# Altium PCB loicpinuela.PcbDoc
Units mm, origin at the board's own origin, x right, y up, seen from the top; angles counter-clockwise.
Board outline 70 x 70 mm, 2 copper layers (Top Layer, Bottom Layer), stack 1.62 mm thick; 79 components, 54 nets, 234 pads, 46 vias.
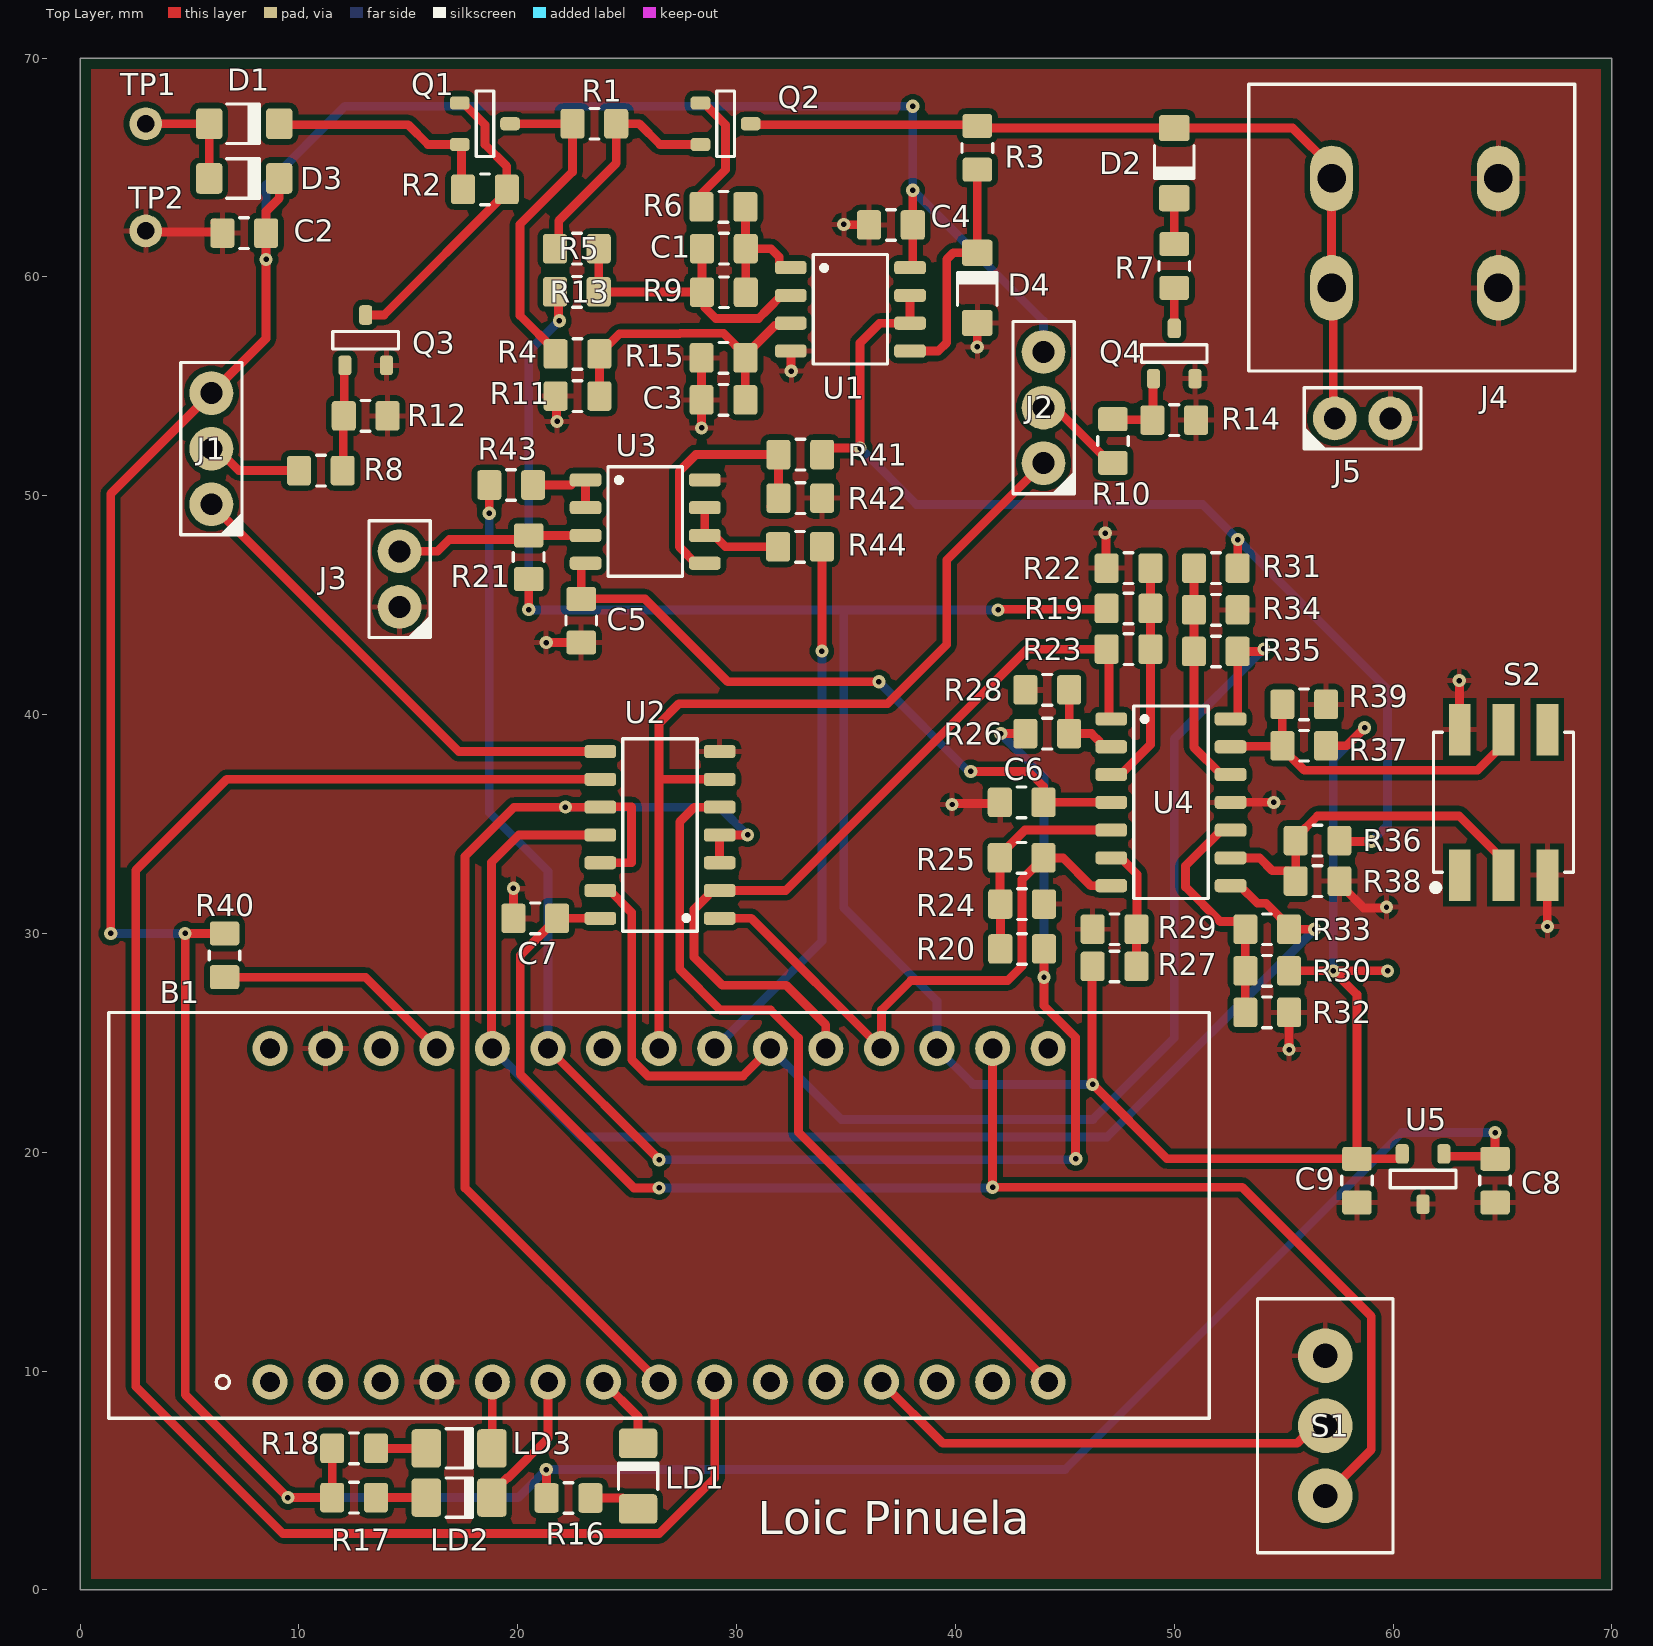
[diagram p0: Top Layer view]
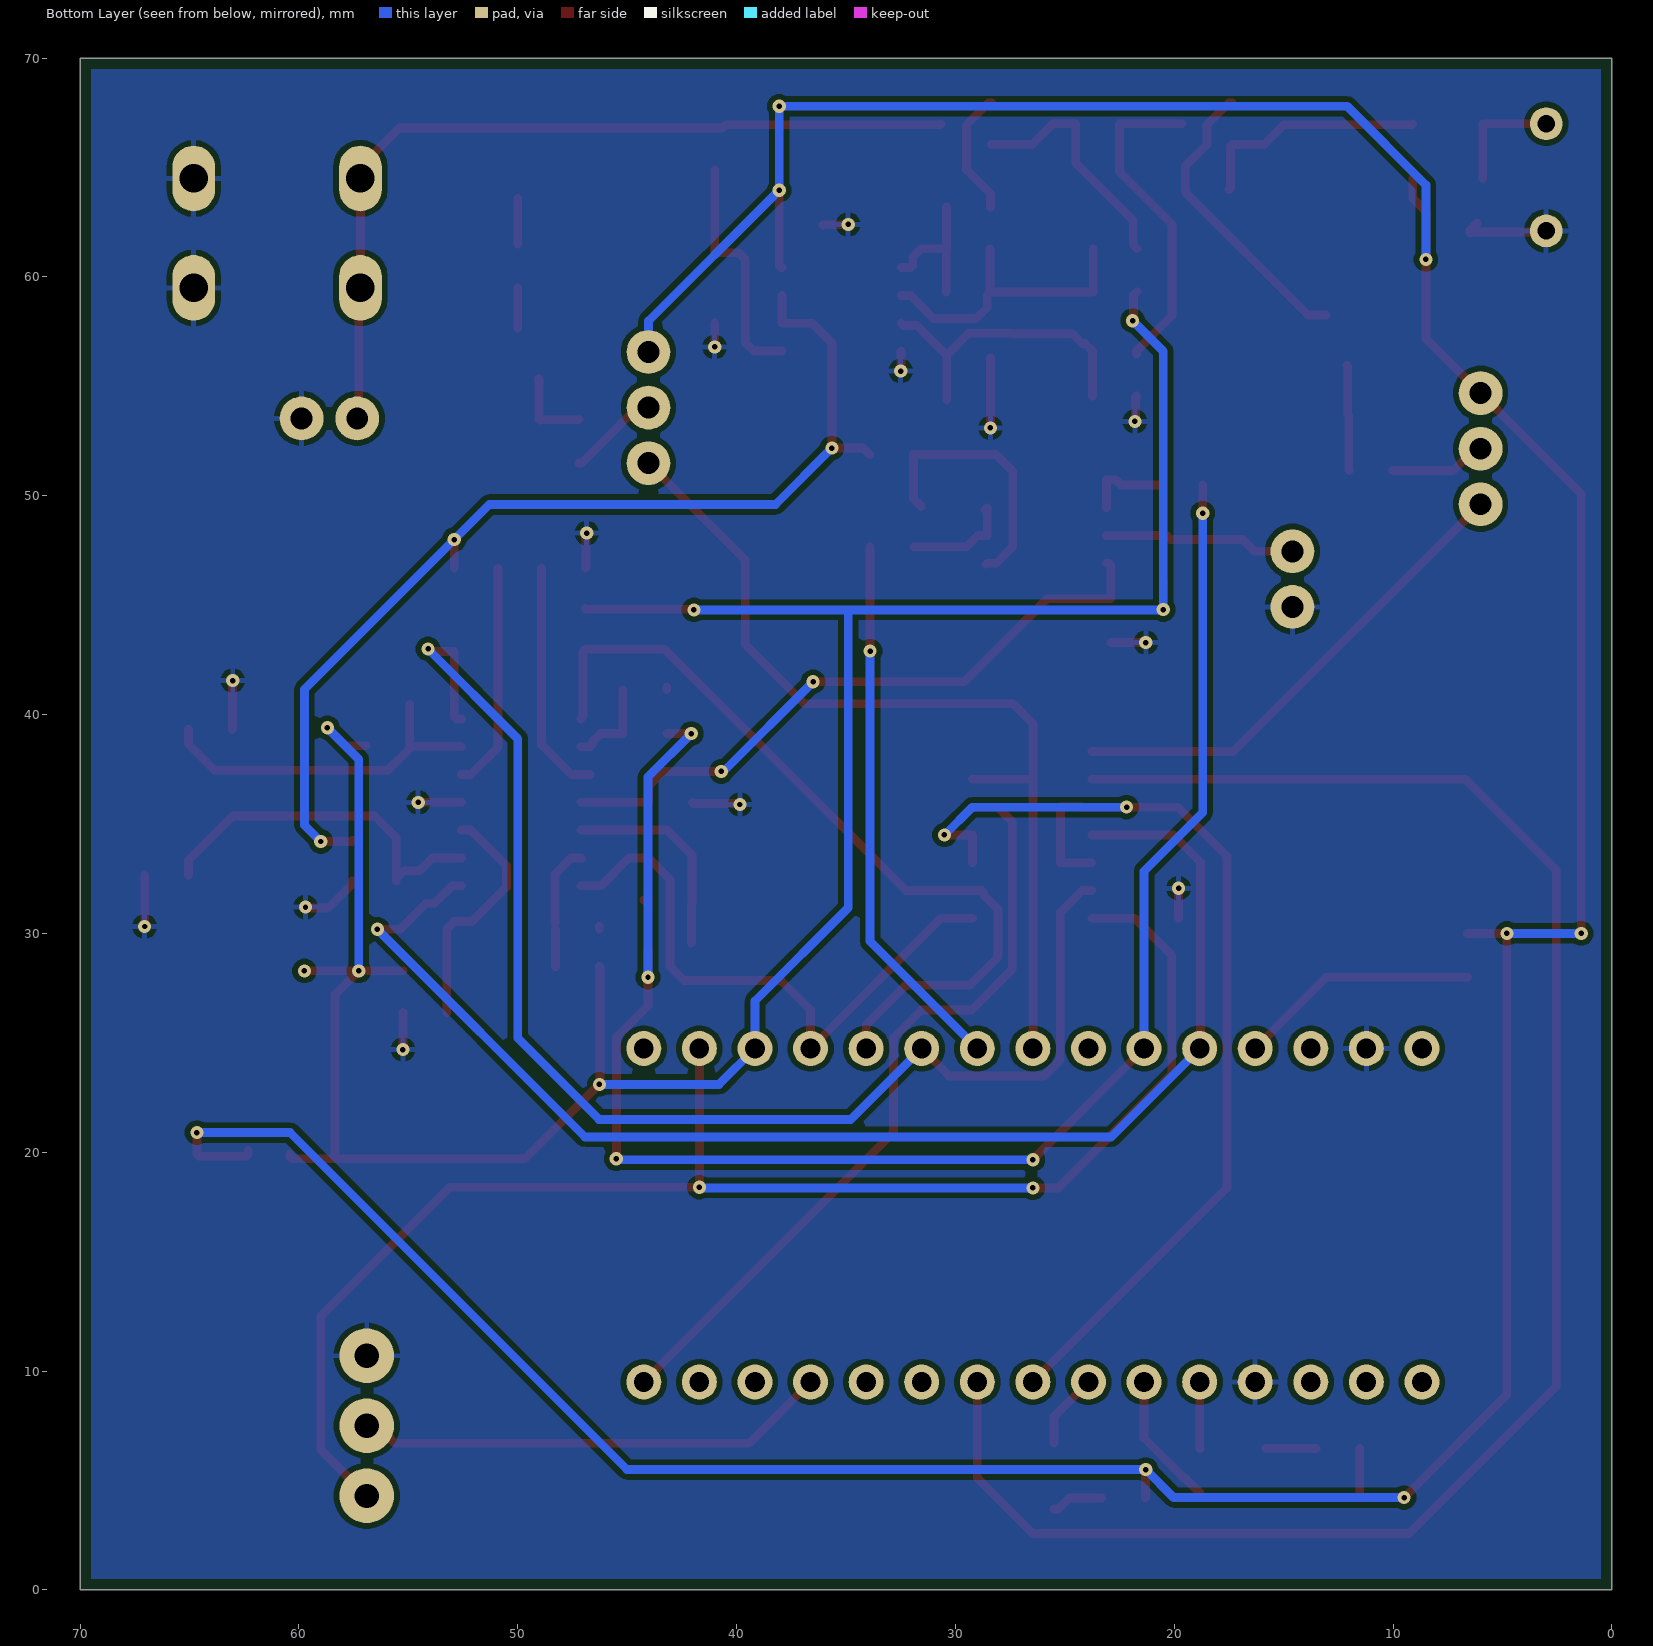
[diagram p1: Bottom Layer view, seen from below]
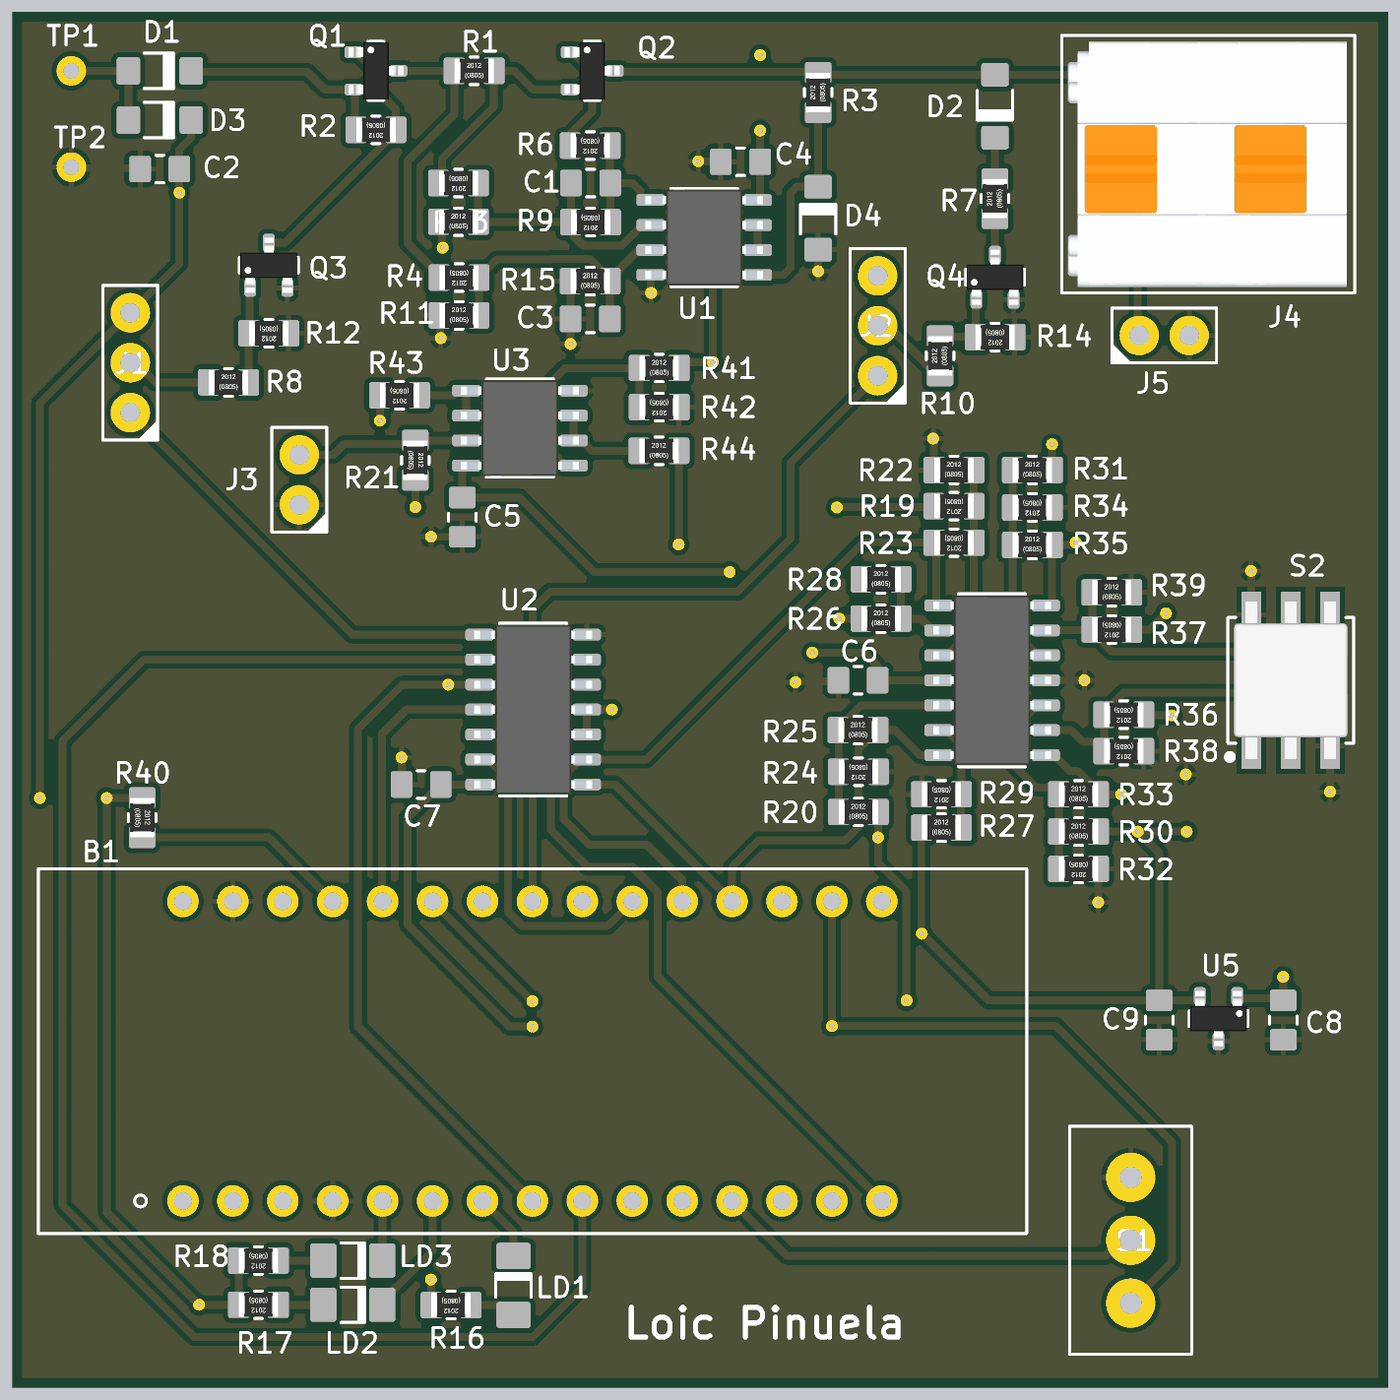
[diagram p2: 3D render of the assembled board from above, using the file's embedded part models]

## Layer stack, top to bottom
Top Solder: solder mask 0.1, Solder Resist, Dk 3.5
Top Layer: signal copper 0.035
Dielectric 1: core 1.55, FR-4, Dk 4.2
Bottom Layer: signal copper 0.035
Bottom Solder: solder mask 0.1, Solder Resist, Dk 3.5

## Board outline
0,0 70,0 70,70 0,70

## Design rules (kind name [scope] priority, off if disabled: settings)
AcuteAngle [All] p1 off: minimum=9.00000000000000E+0001 checktracksonly=TRUE
AssemblyTestPointUsage [All] p1 off:
AssemblyTestpoint [All] p1 off: testpointundercomponent=TRUE minsize=1.016 maxsize=2.54 preferedsize=1.524 minholesize=0 maxholesize=1.016 preferedholesize=0.813 testpointgrid=0.025 usegrid=TRUE gridtolerance=0 allowsidetop=TRUE allowsidebottom=TRUE
BoardOutlineClearance [All] p1 off: gap=0.25 ignorepadtopadclearanceinfootprint=FALSE
Clearance [All] p1: gap=0.25 ignorepadtopadclearanceinfootprint=FALSE
ComponentClearance [All] p1 off: gap=0.25 collisioncheckmode=3 verticalgap=0.25 showdistances=FALSE
DiffPairsRouting [All] p1 off: maxlimit=0.254 minlimit=0.254 mostfreqgap=0.254 toplayer_minwidth=0.381 toplayer_maxwidth=0.381 toplayer_prefwidth=0.381 bottomlayer_minwidth=0.381 bottomlayer_maxwidth=0.381 bottomlayer_prefwidth=0.381 maxuncoupledlength=12.7
FabricationTestPointUsage [All] p1 off: valid=0 allowmultiple=FALSE
FabricationTestpoint [All] p1 off: side=3 testpointundercomponent=TRUE minsize=1.016 maxsize=2.54 preferedsize=1.524 minholesize=0 maxholesize=1.016 preferedholesize=0.813 testpointgrid=0.025 allowsidetop=TRUE allowsidebottom=TRUE usegrid=TRUE gridtolerance=0
FanoutControl Fanout_BGA [IsBGA] p1 off: bgadir=Out bgaviamode=Centered fanoutstyle=Auto fanoutdirection=Alternating viagrid=0.025 // Fanout_BGA (Default Rule)
FanoutControl Fanout_LCC [IsLCC] p2 off: bgadir=Out bgaviamode=Centered fanoutstyle=Auto fanoutdirection=Alternating viagrid=0.025 // Fanout_LCC (Default Rule)
FanoutControl Fanout_SOIC [IsSOIC] p3 off: bgadir=Out bgaviamode=Centered fanoutstyle=Auto fanoutdirection=Alternating viagrid=0.025 // Fanout_SOIC (Default Rule)
FanoutControl Fanout_Small [(CompPinCount < 5)] p4 off: bgadir=Out bgaviamode=Centered fanoutstyle=Auto fanoutdirection=OutThenIn viagrid=0.025 // Fanout_Small (Default Rule)
FanoutControl Fanout_Default [All] p5 off: bgadir=Out bgaviamode=Centered fanoutstyle=Auto fanoutdirection=Alternating viagrid=0.025 // Fanout_Default (Default Rule)
Height [All] p1 off: minheight=0 maxheight=25.4 prefheight=12.7
HoleSize [All] p1: absolutevalues=TRUE maxlimit=3 minlimit=0.25 maxpercent=80.000 minpercent=20.000
HoleToHoleClearance [All] p1 off: gap=0.25 allowstackedmicrovias=TRUE
LayerPairs [All] p1 off: enforce=TRUE
MinimumAnnularRing [All] p1 off: minimumring=0.175
MinimumSolderMaskSliver [All] p1 off: minsoldermaskwidth=0
NetAntennae [All] p1 off: netantennaetolerance=0
PasteMaskExpansion [All] p1 off: expansion=0
PlaneClearance [All] p1 off: clearance=0.25
PlaneConnect [All] p1 off: planeconnectstyle=Direct reliefexpansion=0.5 reliefentries=4 reliefconductorwidth=0.25 reliefairgap=0.25
PolygonConnect [All] p1: connectstyle=Relief reliefconductorwidth=0.25 reliefentries=4 polygonreliefangle="90 Angle" airgapwidth=0.25
RoutingCorners [All] p1 off: cornerstyle=45-Degree minsetback=2.5 maxsetback=2.5
RoutingLayers [All] p1 off: top layer_v5=TRUE bottom layer_v5=TRUE
RoutingPriority [All] p1 off: routingpriority=0
RoutingTopology [All] p1 off: topology=Shortest
RoutingVias [All] p1: holewidth=0.711 width=1.27 viastyle="Through Hole" minholewidth=0.711 minwidth=1.27 maxholewidth=0.711 maxwidth=1.27 useviatemplates=TRUE viatemplateguid#1={857F750E-5D3C-416E-893E-D7E0D3E4223C} viatemplatename#1=v60h25m0mx0
SilkToBoardRegionClearance [All] p1 off:
SilkToSilkClearance [All] p1 off: silktosilkclearance=0
SilkToSolderMaskClearance [IsPad] p1 off: minsilkscreentomaskgap=0 clearancetoexposedcopper=TRUE
SolderMaskExpansion [All] p1: expansion=0 istentingtop=FALSE
Width [All] p1: maxlimit=1 minlimit=0.25 preferedwidth=0.4
3 further rules are at their usual default settings.

## Classes and differential pairs
component class loicpinuela2: C5 C6 J3 R19 R20 R21 R22 R23 R24 R25 R26 R27 R28 R29 R30 R31 R32 R33 R34 R35 R36 R37 R38 R39 R41 R42 R43 R44 S2 U3 U4
component class loicpinuela1: B1 C1 C2 C3 C4 C7 C8 C9 D1 D2 D3 D4 J1 J2 J4 J5 LD1 LD2 LD3 Q1 Q2 Q3 Q4 R1 R2 R3 R4 R5 R6 R7 R8 R9 R10 R11 R12 R13 R14 R15 R16 R17 R18 R40 S1 TP1 TP2 U1 U2 U5

## Components (designator, comment, footprint, x,y, rotation, side; value= is the part's Value field where it differs from the comment)
B1 "NUCLEO-L432KC Socket" "NUCLEO-L432KC Socket" 44.24,9.5 r90 top locked
C1 "NC" "CAPACITOR 2012 REFLOW" 29.42,61.29 r180 top
C2 "10uF" "CAPACITOR 2012 REFLOW" 7.5,62 r0 top
C3 "NC" "CAPACITOR 2012 REFLOW" 29.4,54.38 r0 top
C4 "1uF" "CAPACITOR 2012 REFLOW" 37.05,62.375 r0 top
C5 "1uF" "CAPACITOR 2012 REFLOW" 22.9,44.291 r90 top
C6 "1uF" "CAPACITOR 2012 REFLOW" 43.027,35.991 r0 top
C7 "1uF" "CAPACITOR 2012 REFLOW" 20.8,30.69 r0 top
C8 "1uF" "CAPACITOR 2012 REFLOW" 64.66,18.7 r90 top
C9 "1uF" "CAPACITOR 2012 REFLOW" 58.35,18.7 r90 top
D1 "PMEG3010EXEX" "DIODE SOD123-FL REFLOW" 7.5,67 r180 top
D2 "PMEG3010EXEX" "DIODE SOD123-FL REFLOW" 50,65.2 r90 top
D3 "PMEG3010EXEX" "DIODE SOD123-FL REFLOW" 7.5,64.5 r180 top
D4 "PMEG3010EXEX" "DIODE SOD123-FL REFLOW" 41,59.5 r270 top
J1 "*" "PinHeader1x3 P2.54" 6,52.15 r90 top
J2 "*" "PinHeader1x3 P2.54" 44.027,54.03 r90 top
J3 "" "Socket1x2 P2.54" 14.6,46.191 r90 top
J4 "*" "WE 691411810002" 61,62 r180 top
J5 "" "Socket1x2 P2.54" 58.607,53.534 r0 top
LD1 "*" "LED 3216 REFLOW" 25.5,5.2 r270 top
LD2 "*" "LED 3216 REFLOW" 17.319,4.217 r180 top
LD3 "*" "LED 3216 REFLOW" 17.319,6.467 r180 top
Q1 "*" "SOT23 P0.95 C1.6x3.0 H1.3" 18.5,67 r0 top
Q2 "*" "SOT23 P0.95 C1.6x3.0 H1.3" 29.5,67 r0 top
Q3 "*" "SOT23 P0.95 C1.6x3.0 H1.3" 13.05,57.11 r90 top
Q4 "*" "SOT23 P0.95 C1.6x3.0 H1.3" 50,56.5 r90 top
R1 "3R3" "RESISTOR 2012 REFLOW" 23.5,67 r0 top
R2 "100k" "RESISTOR 2012 REFLOW" 18.5,64 r180 top
R3 "10k" "RESISTOR 2012 REFLOW" 41,65.9 r90 top
R4 "15k" "RESISTOR 2012 REFLOW" 22.73,56.48 r180 top
R5 "15k" "RESISTOR 2012 REFLOW" 22.7,61.29 r180 top
R6 "1k" "RESISTOR 2012 REFLOW" 29.4,63.2 r180 top
R7 "28" "RESISTOR 2012 REFLOW" 50,60.5 r90 top
R8 "1k" "RESISTOR 2012 REFLOW" 11,51.15 r0 top
R9 "NC" "RESISTOR 2012 REFLOW" 29.42,59.3 r180 top
R10 "1k" "RESISTOR 2012 REFLOW" 47.2,52.5 r90 top
R11 "100k" "RESISTOR 2012 REFLOW" 22.73,54.555 r0 top
R12 "100k" "RESISTOR 2012 REFLOW" 13.05,53.65 r180 top
R13 "100k" "RESISTOR 2012 REFLOW" 22.7,59.32 r0 top
R14 "100k" "RESISTOR 2012 REFLOW" 50,53.455 r180 top
R15 "NC" "RESISTOR 2012 REFLOW" 29.4,56.3 r0 top
R16 "1k" "RESISTOR 2012 REFLOW" 22.32,4.2 r180 top
R17 "1k" "RESISTOR 2012 REFLOW" 12.52,4.217 r180 top
R18 "1k" "RESISTOR 2012 REFLOW" 12.52,6.467 r180 top
R19 "121k" "RESISTOR 2012 REFLOW" 47.911,44.851 r180 top
R20 "105k" "RESISTOR 2012 REFLOW" 43.048,29.291 r0 top
R21 "100k" "RESISTOR 2012 REFLOW" 20.5,47.191 r270 top
R22 "806k" "RESISTOR 2012 REFLOW" 47.911,46.691 r0 top
R23 "1M" "RESISTOR 2012 REFLOW" 47.911,42.991 r180 top
R24 "NC" "RESISTOR 2012 REFLOW" 43.048,31.341 r180 top
R25 "1M" "RESISTOR 2012 REFLOW" 43.027,33.451 r0 top
R26 "0R" "RESISTOR 2012 REFLOW" 44.197,39.131 r0 top
R27 "274k" "RESISTOR 2012 REFLOW" 47.272,28.491 r0 top
R28 "NC" "RESISTOR 2012 REFLOW" 44.197,41.131 r0 top
R29 "1M" "RESISTOR 2012 REFLOW" 47.272,30.191 r180 top
R30 "*" "RESISTOR 2012 REFLOW" 54.248,28.291 r0 top
R31 "*" "RESISTOR 2012 REFLOW" 51.898,46.691 r0 top
R32 "*" "RESISTOR 2012 REFLOW" 54.248,26.391 r180 top
R33 "*" "RESISTOR 2012 REFLOW" 54.248,30.191 r0 top
R34 "*" "RESISTOR 2012 REFLOW" 51.898,44.784 r180 top
R35 "*" "RESISTOR 2012 REFLOW" 51.898,42.884 r0 top
R36 "*" "RESISTOR 2012 REFLOW" 56.548,34.241 r180 top
R37 "*" "RESISTOR 2012 REFLOW" 55.939,38.576 r180 top
R38 "*" "RESISTOR 2012 REFLOW" 56.548,32.391 r180 top
R39 "*" "RESISTOR 2012 REFLOW" 55.939,40.466 r0 top
R40 "NC" "RESISTOR 2012 REFLOW" 6.6,29 r270 top
R41 "100k" "RESISTOR 2012 REFLOW" 32.913,51.881 r0 top
R42 "100k" "RESISTOR 2012 REFLOW" 32.913,49.891 r180 top
R43 "1k" "RESISTOR 2012 REFLOW" 19.7,50.491 r180 top
R44 "1k" "RESISTOR 2012 REFLOW" 32.9,47.667 r0 top
S1 "*" "SLIDE SWITCH Knitter MFP120" 56.9,7.5 r90 top
S2 "*" "Push Button E-Switch TL2233" 65.048,35.991 r90 top
TP1 "*" "Hole 0.8 D1.5" 3,67 r90 top
TP2 "*" "Hole 0.8 D1.5" 3.003,62.1 r90 top
U1 "MCP6042-I/SN" "SO8 P1.27 C4.0X5.0 H1.75" 35.2,58.52 r0 top
U2 "" "SO14 P1.27 C4.0X8.8 H1.75" 26.5,34.5 r180 top
U3 "MCP6042-I/SN" "SO8 P1.27 C4.0X5.0 H1.75" 25.825,48.822 r0 top
U4 "MCP6544-E/SL" "SO14 P1.27 C4.0X8.8 H1.75" 49.848,35.991 r0 top
U5 "3.3" "SOT23 P0.95 C1.6x3.0 H1.3" 61.371,18.775 r270 top

## Footprints (in the part's own frame and the unit in brackets; to place one, negate y for a bottom-side part, rotate by r counter-clockwise, add the part's x,y. Pads: shape width x height; smd on the part's side, far side on the other; paste and mask are expansions set on the pad)
"CAPACITOR 2012 REFLOW" [mm] "Capacitor SMD 2.0x1.2mm (0805-imperial)"
  rrect25% 1.1x1.35 smd: 1(-1,0) 2(1,0)
  silkscreen extent -0.2,-0.7 0.2,0.7, body extent -1,-0.6 1,0.6, height 1
"DIODE SOD123-FL REFLOW" [mm] "DIODE SMD SOD123-FL, 2-Leads, Body 2.8x1.60mm"
  rrect25% 1.2x1.4 smd: 1(-1.6,0) 2(1.6,0)
  silkscreen extent -0.77,-0.9 0.8,0.9, body extent -1.9,-0.9 1.9,0.9, height 1.31
"Hole 0.8 D1.5" [mm] "Test Point Hole 0.8 Pad diameter 1.5"
  round 1.5 hole 0.8: 1(0,0)
"LED 3216 REFLOW" [mm] "LED SMD 3.2x1.6mm (1206-imperial)"
  rrect25% 1.35x1.75 smd: 1(-1.5,0) 2(1.5,0)
  silkscreen extent -0.6,-0.9 0.6,0.9, body extent -1.7,-0.9 1.7,0.9, height 1.1
"NUCLEO-L432KC Socket" [mm] "ARM Cortex based board"
  round 1.6 hole 0.9: 1(0,35.56) 2(0,33.02) 3(0,30.48) 4(0,27.94) 5(0,25.4) 6(0,22.86) 7(0,20.32) 8(0,17.78) 9(0,15.24) 10(0,12.7) 11(0,10.16) 12(0,7.62) 13(0,5.08) 14(0,2.54) 15(0,0) 16(15.24,0) 17(15.24,2.54) 18(15.24,5.08) 19(15.24,7.62) 20(15.24,10.16) 21(15.24,12.7) 22(15.24,15.24) 23(15.24,17.78) 24(15.24,20.32) 25(15.24,22.86) 26(15.24,25.4) 27(15.24,27.94) 28(15.24,30.48) 29(15.24,33.02) 30(15.24,35.56)
  silkscreen extent -1.65,-7.37 16.89,42.93, body extent -1.27,-1.27 16.51,36.83, height 7.01
"PinHeader1x3 P2.54" [mm] "Plug connector"
  round 2 hole 1: 1(-2.54,0) 2(0,0) 3(2.54,0)
  silkscreen extent -3.94,-1.4 3.94,1.4, body extent -3.88,-1.27 3.74,1.27, height 8.5
"Push Button E-Switch TL2233" [mm] "Dual Through Hole Right Angle Tactile Switch"
  rect 2.35x1 smd: 1(-3.325,2) 2(-3.325,0) 3(-3.325,-2) 4(3.325,2) 5(3.325,0) 6(3.325,-2)
  silkscreen extent -4.05,-3.2 3.2,3.25, body extent -4,-2.9 4,2.9, height 7.9
"RESISTOR 2012 REFLOW" [mm] "Resistor SMD 2.0x1.2mm (0805-imperial)"
  rrect25% 1.1x1.35 smd: 1(-1,0) 2(1,0)
  silkscreen extent -0.2,-0.7 0.2,0.7, body extent -1,-0.63 1,0.63, height 0.45
"SLIDE SWITCH Knitter MFP120" [mm] "Slide Switch Knitter-Switch type MFP120"
  round 2.5 hole 1.1: 1(-3.2,0) 2(0,0) 3(3.2,0)
  silkscreen extent -5.8,-3.1 5.8,3.1, body extent -5.5,-2.8 5.5,2.8, height 10
"SO8 P1.27 C4.0X5.0 H1.75" [mm] "8-Pin Small Outline Integrated Circuit 1.27 mm Pitch, IPC Medium Density"
  rrect50% 1.45x0.6 smd: 1(-2.725,1.905) 2(-2.725,0.635) 3(-2.725,-0.635) 4(-2.725,-1.905) 5(2.725,-1.905) 6(2.725,-0.635) 7(2.725,0.635) 8(2.725,1.905)
  silkscreen extent -1.7,-2.5 1.7,2.5, body extent -3,-2.45 3,2.45, height 1.75
"SO14 P1.27 C4.0X8.8 H1.75" [mm] "SOIC, 14-Leads, Body 4.0X8.8mm, Pitch 1.27mm, IPC Medium Density"
  rrect50% 1.45x0.6 smd: 1(-2.725,3.81) 2(-2.725,2.54) 3(-2.725,1.27) 4(-2.725,0) 5(-2.725,-1.27) 6(-2.725,-2.54) 7(-2.725,-3.81) 8(2.725,-3.81) 9(2.725,-2.54) 10(2.725,-1.27) 11(2.725,0) 12(2.725,1.27) 13(2.725,2.54) 14(2.725,3.81)
  silkscreen extent -1.7,-4.4 1.7,4.4, body extent -3,-4.33 3,4.33, height 1.75
"Socket1x2 P2.54" [mm] "Receptacle connector"
  round 2 hole 1: 1(-1.27,0) 2(1.27,0)
  silkscreen extent -2.67,-1.4 2.67,1.4, body extent -2.54,-1.27 2.54,1.27, height 7.01
"SOT23 P0.95 C1.6x3.0 H1.3" [mm] "SOT23, 3-Leads, Body 1.6x3.0mm, Pitch 0.95mm, IPC Medium Density"
  rrect50% 0.9x0.6 smd: 1(-1.15,0.95) 2(-1.15,-0.95) 3(1.15,0)
  silkscreen extent -0.4,-1.5 0.4,1.5, body extent -1.4,-1.45 1.4,1.45, height 1.3
"WE 691411810002" [mm] "PCB screwless connector, male header, Pitch 7.62 mm, 2 poles, WR-TBL Series 4114"
  oval 1.95x3 hole 1.3: 1(-3.81,-2.5) 1(-3.81,2.5) 2(3.81,-2.5) 2(3.81,2.5)
  silkscreen extent -7.3,-6.8 7.6,6.3, body extent -6.9,-6.5 7.3,6, height 13.91

## Part data
B1: "ARM Cortex based board"
C1 C2 C3 C4 C5 C6 C7 C8 C9: library part Capacitor, "Capacitor"
D1 D2 D3 D4: library part "DIODE SCHOTTKY", "Diode Schottky generic 2 Leads"
J1 J2: library part PinHeader1x3, "Plug connector"
J3 J5: library part Socket1x2, "Receptacle connector"
J4: library part Header2, "PCB terminal block"
LD1 LD2 LD3: library part LED, "LED generic"
Q1 Q2: library part "MOS-P SOT23 G-S-D", "Generic MOS-P"
Q3 Q4: library part "MOS-N SOT23 G-S-D", "Generic MOS-N"
R1 R9 R15 R40: library part Resistor, "Resistor"
R2 R3 R4 R5 R6 R7 R8 R10 R11 R12 R13 R14 R16 R17 R18 R19 R20 R21 R22 R23 R24 R25 R26 R27 R28 R29 R30 R31 R32 R33 R34 R35 R36 R37 R38 R39 R41 R42 R43 R44: library part Resistor, "Resistor", tolerance=1%
S1: library part "Slide Switch 1Pole ON-ON", "Slide Switch 1Pole ON-ON"
S2: library part "Push Button E-Switch TL2233", "Pushbutton, DPDT, SMD Switch"
TP1 TP2: library part Hole, "Hole"
U1 U3: library part "OPA DUAL", "Generic dual OPA 8 pins"
U2: library part "GATE AND 3X  TRIPLE INPUT 14P", "GATE AND 3X  TRIPLE INPUT 14P"
U4: library part "COMPARATOR QUAD OUT PIN 1-7-8-14", "Generic quad comparator 14 pins, Outpout PIN 1-7-18-14"
U5: library part "REFERENCE SOT23 IN,OUT,GND", "Generic Positive Voltage Reference"

## Via types
v1: diameter 0.6, hole 0.25, Top Layer to Bottom Layer, 46 vias

## Nets (pads, with @x,y where several pads share a name; then routed paths per layer and width w, separated by ;. In a path a pad name is that pad's centre, name@x,y a point inside that pad or via, vN(x,y) a via of type N, cw(c..) or ccw(c..) an arc to the next point about the centre after c; other vN are vias at no path point)
3V3: C5.2 C6.2 U3.4 U4.4 | length 30.3
  Top Layer w0.4: U3.4 23,46.917 22.9,46.817 C5.2 25.809,45.291 29.6,41.5 v1(36.5,41.5) ; v1(40.7,37.4) 43.34,37.4 44.027,36.713 C6.2 U4.4
  Bottom Layer w0.4: v1(36.5,41.5) 40.6,37.4 v1(40.7,37.4)
+3V3: B1.17 C7.2 S1.1 U2.14 | length 68.7
  Top Layer w0.4: U2.14 C7.2 20.11,29 20.11,23.564 25.304,18.37 v1(26.463,18.37) ; B1.17 v1(41.7,18.4) 53.1,18.4 59,12.5 59,6.4 S1.1
  Bottom Layer w0.4: v1(26.463,18.37) 41.67,18.37 v1(41.7,18.4)
+5V0: C2.2 C4.2 C8.2 D3.1 J1.3 J2.3 R16.2 R17.2 R18.2 R40.1 U1.8 U5.1 | length 193.6
  Top Layer w0.4: v1(1.4,30) 1.4,50.09 J1.3 8.5,57.19 v1(8.5,60.8) C2.2 8.5,63 9.1,63.6 D3.1 ; R40.1 v1(4.8,30) 4.8,8.917 v1(9.5,4.217) R17.2 R18.2 ; v1(21.3,5.5) 21.31,5.49 21.31,4.21 R16.2 ; U1.8 37.95,60.425 38.05,60.525 C4.2 v1(38.05,63.96) ; U5.1@62.321,20.075 U5.1 62.321,19.913 62.421,19.813 64.548,19.813 64.66,19.925 v1(64.66,20.9)
  Bottom Layer w0.4: v1(1.4,30) v1(4.8,30) ; v1(8.5,60.8) 8.5,64.2 12.1,67.8 v1(38.048,67.8) 38.05,67.798 v1(38.05,63.96) 44.027,57.983 J2.3 ; v1(9.5,4.217) 20.017,4.217 v1(21.3,5.5) 45.005,5.5 60.405,20.9 v1(64.66,20.9)
+5V5: D1.2 D3.2 TP1.1 | length 5.4
  Top Layer w0.4: TP1.1@3,67 D1.2 D3.2
BattH: B1.26 R33.2 U2.11 U4.8 | length 61.9
  Top Layer w0.4: B1.26 18.8,24.78 18.8,33.248 20.052,34.5 U2.11 ; U4.8 52.998,32.181 53.806,31.373 54.191,31.373 55.373,30.191 v1(56.415,30.191)
  Bottom Layer w0.4: B1.26 22.88,20.7 46.924,20.7 v1(56.415,30.191)
BattL: B1.21 R35.2 U2.13 U4.14 | length 61.2
  Top Layer w0.4: U2.13 24.2,31.96 25.21,30.95 25.21,24.222 25.942,23.49 30.29,23.49 B1.21 ; U4.14 52.798,39.801 52.898,39.901 R35.2 53.984,42.884 v1(54.1,43)
  Bottom Layer w0.4: B1.21 34.78,21.5 46.282,21.5 50,25.218 50,38.9 v1(54.1,43)
GND: B1.4 B1.29 C2.1 C3.1 C4.1 C5.1 C6.1 C7.1 C8.1 C9.1 D4.2 J3.1 J4.1 J5.2 Q3.2 Q4.2 R11.1 R12.1 R14.1 R15.1 R22.1 R24.1 R28.1 R29.2 R32.1 R34.1 R38.1 R39.2 R42.1 S1.3 S2.3 S2.4 TP2.1 U1.4 U2.7 U3.8 U4.11 U5.3 | length 30.1
  Top Layer w0.4: TP2.1 3.053,62.05 6.45,62.05 C2.1 6.5,62.125 C2.1@6.15,62.475 ; v1@19.752,32.11 v1(19.8,32.062) C7.1 ; v1(21.3,43.291) C5.1 ; R11.1 21.765,54.52 21.765,53.435 v1(21.8,53.4) ; v1(28.4,53.1) C3.1 R15.1 ; U1.4 32.487,56.603 32.487,55.712 v1(32.5,55.7) ; v1(34.9,62.4) 34.913,62.387 36.038,62.387 C4.1 ; v1(39.848,35.891) 39.898,35.941 41.977,35.941 C6.1 ; v1(41,56.8) D4.2 ; R28.1 R28.1@43.197,41.256 ; R24.1 R24.1@44.232,31.524 ; R29.2 R29.2@46.272,30.316 ; v1(46.848,48.291) 46.88,48.259 46.88,46.722 R22.1 ; U4.11 v1(54.548,35.991) ; v1(55.248,24.691) R32.1 ; R38.1 57.548,32.266 58.654,31.16 59.66,31.16 v1(59.7,31.2) ; v1(63.023,41.555) 63.036,41.542 63.036,39.328 S2.4 ; v1(67.048,30.316) S2.3
LED_B: B1.7 LD1.1 | length 3.5
  Top Layer w0.4: B1.7 25.5,7.92 LD1.1
LED_G: B1.6 LD2.1 | length 6.4
  Top Layer w0.4: LD2.1 18.819,4.417 19.544,5.142 19.582,5.142 21.38,6.94 B1.6
LED_R: B1.5 LD3.1 | length 3
  Top Layer w0.4: LD3.1 18.83,6.477 18.83,9.489 B1.5
MCU_CH: B1.9 U2.9 | length 81.2
  Top Layer w0.4: U2.9 6.7,37.04 2.547,32.887 2.547,9.292 9.264,2.575 26.463,2.575 29,5.112 B1.9
MCU_DIS: B1.15 U2.5 | length 36
  Top Layer w0.4: U2.5 28.8,35.77 28.07,35.77 27.4,35.1 27.4,28.361 29.261,26.5 31.547,26.5 32.83,25.218 32.83,20.91 B1.15
NetB1_12: B1.12 S1.2 | length 21.8
  Top Layer w0.4: B1.12 39.419,6.701 55.616,6.701 56.415,7.5 S1.2
NetB1_27: B1.27 R40.2 | length 11.1
  Top Layer w0.4: R40.2 13.04,28 B1.27
NetC1_1: C1.1 R6.1 R9.1 U1.1 | length 6.5
  Top Layer w0.4: R6.1 30.41,63.19 30.41,61.3 C1.1 ; R9.1 C1.1 ; U1.1 32.05,60.425 31.95,60.525 31.95,60.91 31.57,61.29 C1.1
NetD1_1: D1.1 Q1.2 R2.2 | length 10.8
  Top Layer w0.4: D1.1 9.15,66.95 15,66.95 15.9,66.05 Q1.2 17.425,65.975 17.425,64.075 R2.2
NetD2_1: D2.1 R7.2 | length 2.1
  Top Layer w0.4: R7.2 D2.1
NetD4_1: D4.1 R3.1 U1.5 | length 11
  Top Layer w0.4: U1.5 39.22,56.615 39.6,56.995 39.6,60.802 39.898,61.1 D4.1 R3.1
NetJ1_2: J1.2 R8.1 | length 4.4
  Top Layer w0.4: J1.2 6.263,52.15 7.263,51.15 R8.1
NetJ2_2: J2.2 R10.1 | length 4.2
  Top Layer w0.4: J2.2 44.334,53.724 44.851,53.724 47.075,51.5 R10.1
NetJ3_2: J3.2 R21.1 U3.3 | length 8.8
  Top Layer w0.4: J3.2 16.333,47.461 16.873,48 20.184,48 20.373,48.189 23.098,48.189 U3.3
NetLD1_2: LD1.2 R16.1 | length 2.4
  Top Layer w0.4: R16.1 24.8,4.2 25.3,3.7 LD1.2
NetLD2_2: LD2.2 R17.1 | length 2.3
  Top Layer w0.4: R17.1 LD2.2
NetLD3_2: LD3.2 R18.1 | length 2.3
  Top Layer w0.4: R18.1 LD3.2
NetQ1_1: Q1.1 Q3.3 R2.1 | length 13.8
  Top Layer w0.4: Q3.3 13.885,58.26 19.5,63.875 R2.1 19.5,65.05 18.5,66.05 18.5,66.95 17.5,67.95 Q1.1
NetQ1_3: Q1.3 R1.1 R4.2 | length 15
  Top Layer w0.4: Q1.3 R1.1 22.5,64.8 20.1,62.4 20.1,58.235 21.73,56.605 R4.2
NetQ2_1: Q2.1 R6.2 | length 5.8
  Top Layer w0.4: Q2.1 28.495,67.95 29.495,66.95 29.495,64.895 28.4,63.8 R6.2
NetQ2_2: Q2.2 R1.2 R5.2 | length 11.1
  Top Layer w0.4: R5.2 21.875,61.465 21.875,62.565 24.5,65.19 R1.2 25.55,67 26.5,66.05 Q2.2
NetQ3_1: Q3.1 R8.2 R12.2 | length 4.9
  Top Layer w0.4: R8.2 12.025,51.175 12.025,53.625 R12.2 12.075,53.675 12.075,55.935 Q3.1
NetQ4_1: Q4.1 R10.2 R14.2 | length 3.7
  Top Layer w0.4: R10.2 47.222,53.478 48.978,53.478 R14.2 49.025,53.48 49.025,55.325 Q4.1
NetQ4_3: Q4.3 R7.1 | length 1.8
  Top Layer w0.4: Q4.3 R7.1
NetR19_1: R19.1 R22.2 R23.1 U4.3 | length 10.8
  Top Layer w0.4: U4.3@46.698,37.261 U4.3 47.548,37.261 48.911,38.623 R23.1 R19.1 R22.2
NetR20_1: R20.1 R24.2 R25.1 U4.5 | length 9.6
  Top Layer w0.4: R20.1@42.069,29.566 42.059,29.576 42.059,31.33 R24.2 42.038,31.351 42.038,33.565 42.027,33.576 43.172,34.721 U4.5
NetR26_2: R26.2 R28.2 U4.2 | length 4.2
  Top Layer w0.4: R28.2 45.197,40.831 R26.2 46.22,39.131 46.598,38.752 46.598,38.631 46.698,38.531 U4.2
NetR27_2: R27.2 R29.1 U4.6 | length 5.5
  Top Layer w0.4: U4.6@47.079,33.406 U4.6 47.548,33.451 48.298,32.701 R29.1@48.298,30.467 ; R27.2 R29.1
NetR30_1: R30.1 R32.2 R33.1 U4.10 | length 10.8
  Top Layer w0.4: U4.10 52.148,34.721 50.514,33.086 50.514,32.125 52.098,30.541 52.898,30.541 R33.1 ; R32.2 R30.1 R33.1@53.248,29.991
NetR31_1: R31.1 R34.2 R35.1 U4.12 | length 10.4
  Top Layer w0.4: R31.1 R34.2 R35.1 50.898,38.511 52.148,37.261 U4.12
NetR36_2: R36.2 R38.2 S2.2 U4.9 | length 16.8
  Top Layer w0.4: U4.9 53.898,33.451 54.483,32.866 55.198,32.866 R38.2@55.548,32.516 ; R38.2 R38.2@55.548,32.516 ; S2.2 65.048,33.341 63.023,35.366 56.548,35.366 55.548,34.366 R36.2 R38.2@55.548,32.516
NetR37_2: R37.2 R39.1 S2.5 U4.13 | length 16.1
  Top Layer w0.4: U4.13 52.596,38.553 54.916,38.553 R37.2 ; R39.1 R37.2 ; S2.5 65.048,38.641 63.859,37.451 55.939,37.451 54.939,38.451 R37.2
NetR41_1: R41.1 R42.2 U3.5 | length 12.4
  Top Layer w0.4: U3.5@28.6,46.867 U3.5 28.125,46.917 27.375,47.667 27.375,51.125 28.13,51.881 R41.1 R42.2 31.913,49.863 R42.2@31.563,49.513
NetR43_1: R43.1 U3.1 U3.2 | length 3.8
  Top Layer w0.4: R43.1 22.439,50.491 22.675,50.727 U3.1 U3.2
NetR44_1: R44.1 U3.6 U3.7 | length 5
  Top Layer w0.4: U3.7@28.65,49.357 U3.7 U3.6 28.975,48.187 29.495,47.667 R44.1
TempH: B1.19 R25.2 U2.1 U4.7 | length 27.8
  Top Layer w0.4: U2.1 30.67,30.69 B1.19 36.62,26.5 37.968,27.848 42.387,27.848 43.048,28.51 43.048,30.316 43.048,32.472 R25.2 44.915,33.451 46.185,32.181 U4.7
TempL: B1.20 R23.2 U2.2 U4.1 | length 37.7
  Top Layer w0.4: B1.20 34.08,25.82 32.269,27.631 29.344,27.631 28.05,28.925 28.05,31.089 28.7,31.739 28.7,31.86 28.8,31.96 U2.2 32.245,31.96 39.098,38.813 43.276,42.991 R23.2 47.017,42.884 47.017,39.901 47.117,39.801 U4.1
Vbat: D2.2 J4.2 J5.1 Q2.3 R3.2 | length 38.9
  Top Layer w0.4: Q2.3 30.7,66.95 40.5,66.95 40.65,66.8 D2.2 55.415,66.8 57.19,65.025 57.19,64.5 57.19,59.5 57.263,59.427 57.263,53.608 J5.1
VbattMCU: B1.22 R44.2 | length 25
  Top Layer w0.4: v1(33.9,42.9) R44.2
  Bottom Layer w0.4: B1.22 33.9,29.64 v1(33.9,42.9)
Vchargeok: B1.8 U2.3 U2.4 U2.10 U2.12 | length 51.6
  Top Layer w0.4: U2.12 25.2,33.23 25.2,35.792 U2.10@24.222,35.792 ; U2.10@24.2,35.77 U2.10 v1(22.18,35.77) 19.829,35.77 17.59,33.531 17.59,18.37 B1.8 ; U2.3 U2.4 v1(30.5,34.5)
  Bottom Layer w0.4: v1(22.18,35.77) 29.23,35.77 v1(30.5,34.5)
Vchargeon: J1.1 U2.8 | length 22.5
  Top Layer w0.4: J1.1 17.3,38.31 U2.8
Vdischarge: B1.23 J2.1 U2.6 | length 42.4
  Top Layer w0.4: B1.23 26.46,37.04 ; U2.6 26.46,37.04 ; J2.1 39.6,47.063 39.6,43.2 36.9,40.5 27.364,40.5 26.46,39.596 26.46,37.04
Vmesbat: R31.2 R36.1 R41.2 U1.6 U1.7 | length 49.3
  Top Layer w0.4: R41.2 34.211,52.179 v1(35.645,52.179) 35.645,56.995 36.535,57.885 U1.6 U1.7 ; R31.2 v1(52.9,48) v1(52.9,48) ; R36.1 57.589,34.2 v1(59,34.2)
  Bottom Layer w0.4: v1(35.645,52.179) 38.224,49.6 51.3,49.6 v1(52.9,48) 59.748,41.152 59.748,34.948 v1(59,34.2)
Vref: B1.18 C9.2 R13.1 R19.2 R21.2 R27.1 R30.2 R37.1 U5.2 | length 121.1
  Top Layer w0.4: v1(20.5,44.8) R21.2 ; R13.1 21.862,59.158 21.862,58.038 v1(21.9,58) ; v1(41.948,44.784) 41.982,44.818 46.878,44.818 R19.2 ; R27.1 46.246,28.464 46.246,23.126 v1(46.272,23.1) 49.672,19.7 C9.2 ; R30.2 v1(57.263,28.291) ; R37.1 57.876,38.576 v1(58.7,39.4) ; v1(59.748,28.291) v1(57.263,28.291) ; U5.2 60.421,19.8 60.321,19.7 C9.2 ; v1(57.263,28.291) 58.35,27.204 C9.2
  Bottom Layer w0.4: v1(21.9,58) 20.5,56.6 v1(20.5,44.8) 20.516,44.784 34.9,44.784 ; v1(41.948,44.784) 34.9,44.784 ; v1(46.272,23.1) 40.8,23.1 B1.18 39.16,26.911 34.9,31.171 34.9,44.784 ; v1(57.263,28.291) 57.263,37.963 v1(58.7,39.4)
VTemp: B1.25 R20.2 R26.1 R43.2 | length 76.4
  Top Layer w0.4: v1(18.7,49.2) R43.2 ; B1.25 v1(26.46,19.66) ; v1(42.069,39.131) R26.1 ; R20.2 v1(44.048,27.995) 44.048,26.699 45.49,25.258 v1@45.49,19.7
  Bottom Layer w0.4: v1(18.7,49.2) 18.7,35.524 21.38,32.844 B1.25 ; v1(26.46,19.66) 45.46,19.66 v1(45.5,19.7) ; v1(42.069,39.131) 44.048,37.152 v1(44.048,27.995)
Vx: C3.2 R4.1 R11.2 R15.2 U1.3 | length 14.2
  Top Layer w0.4: R11.2 R4.1 23.73,56.605 24.08,56.955 24.205,56.955 24.65,57.4 27.4,57.4 27.425,57.425 29.4,57.425 R15.2@30.4,56.425 ; C3.2 R15.2 R15.2@30.4,56.425 ; U1.3 32.375,57.785 31.76,57.785 R15.2@30.4,56.425
Vy: C1.2 R5.1 R9.2 R13.2 U1.2 | length 14
  Top Layer w0.4: R5.1 R13.2 23.71,59.31 28.41,59.31 R9.2 ; C1.2 R9.2 ; U1.2 32.05,59.155 31.42,58.525 31.42,58.519 31.001,58.1 29.05,58.1 28.55,58.6 28.55,59.17 R9.2
pads on no net: B1.1 B1.2 B1.3 B1.10 B1.11 B1.13 B1.14 B1.16 B1.24 B1.28 B1.30 S2.1 S2.6

## Polygon pours and split planes (outlines as drawn)
GND on Bottom Layer "NONET_L01_P-001" (solid, pour order 0): 0.5,69.5 69.5,69.5 69.5,0.5 0.5,0.5
GND on Top Layer "NONET_L01_P-001" (solid, pour order 1): 0.5,69.5 69.5,69.5 69.5,0.5 0.5,0.5

## Silkscreen, mask and mechanical layers (free items; w line width, h text height)
Top Overlay:
  text "Loic Pinuela" at 30.965,2.554 h1.52
Mechanical 1:
  the board outline again, w0.15